# Altium PCB PCB Other.PcbDoc
Units mm, origin at the board's own origin, x right, y up, seen from the top; angles counter-clockwise.
Board outline 66.85 x 61.88 mm, 2 copper layers (Top Layer, Bottom Layer); 14 components, 8 nets, 43 pads, 4 vias.
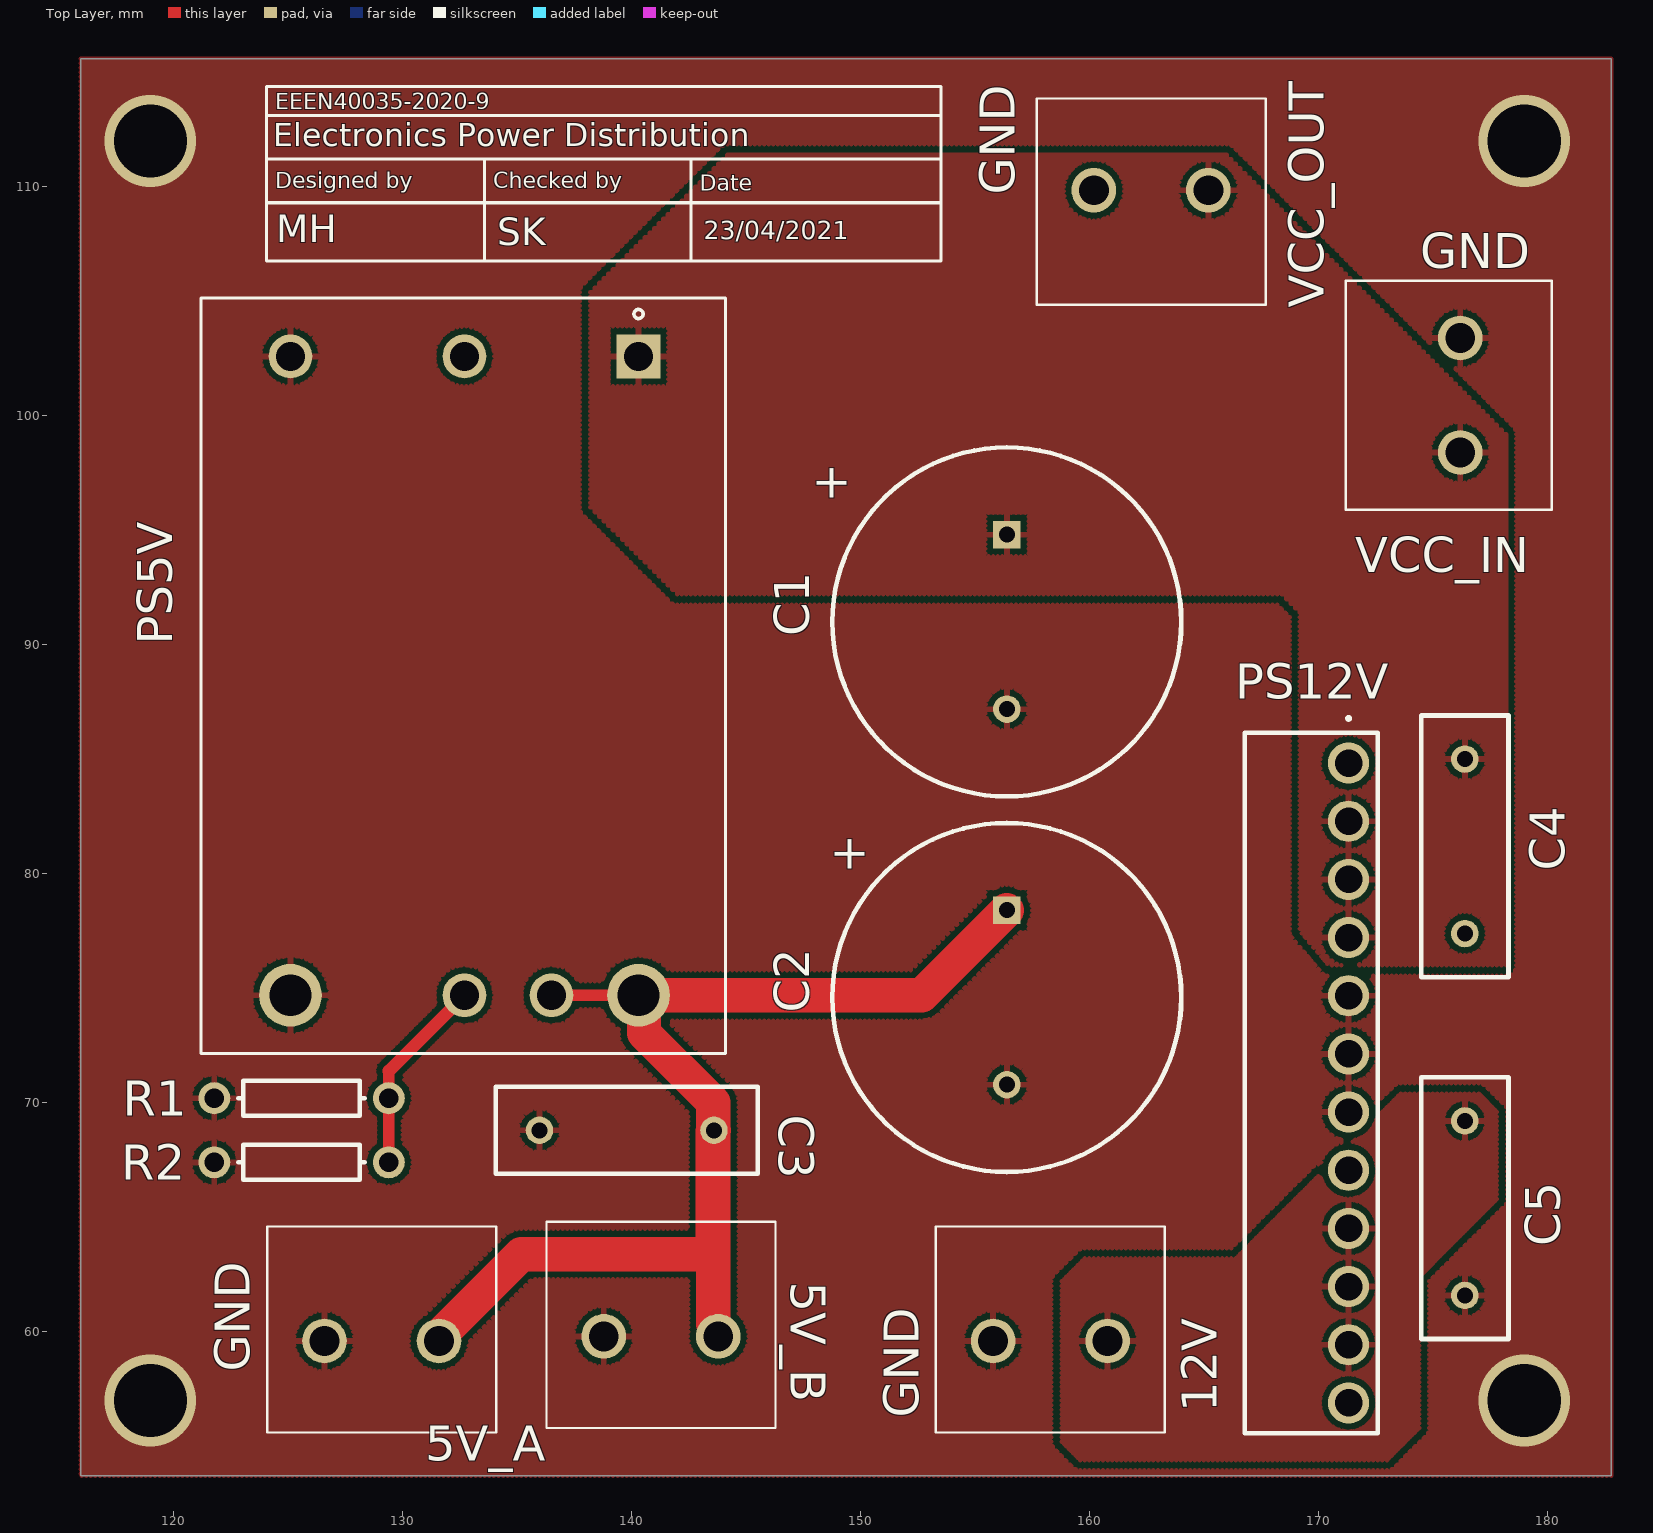
[diagram p0: Top Layer view]
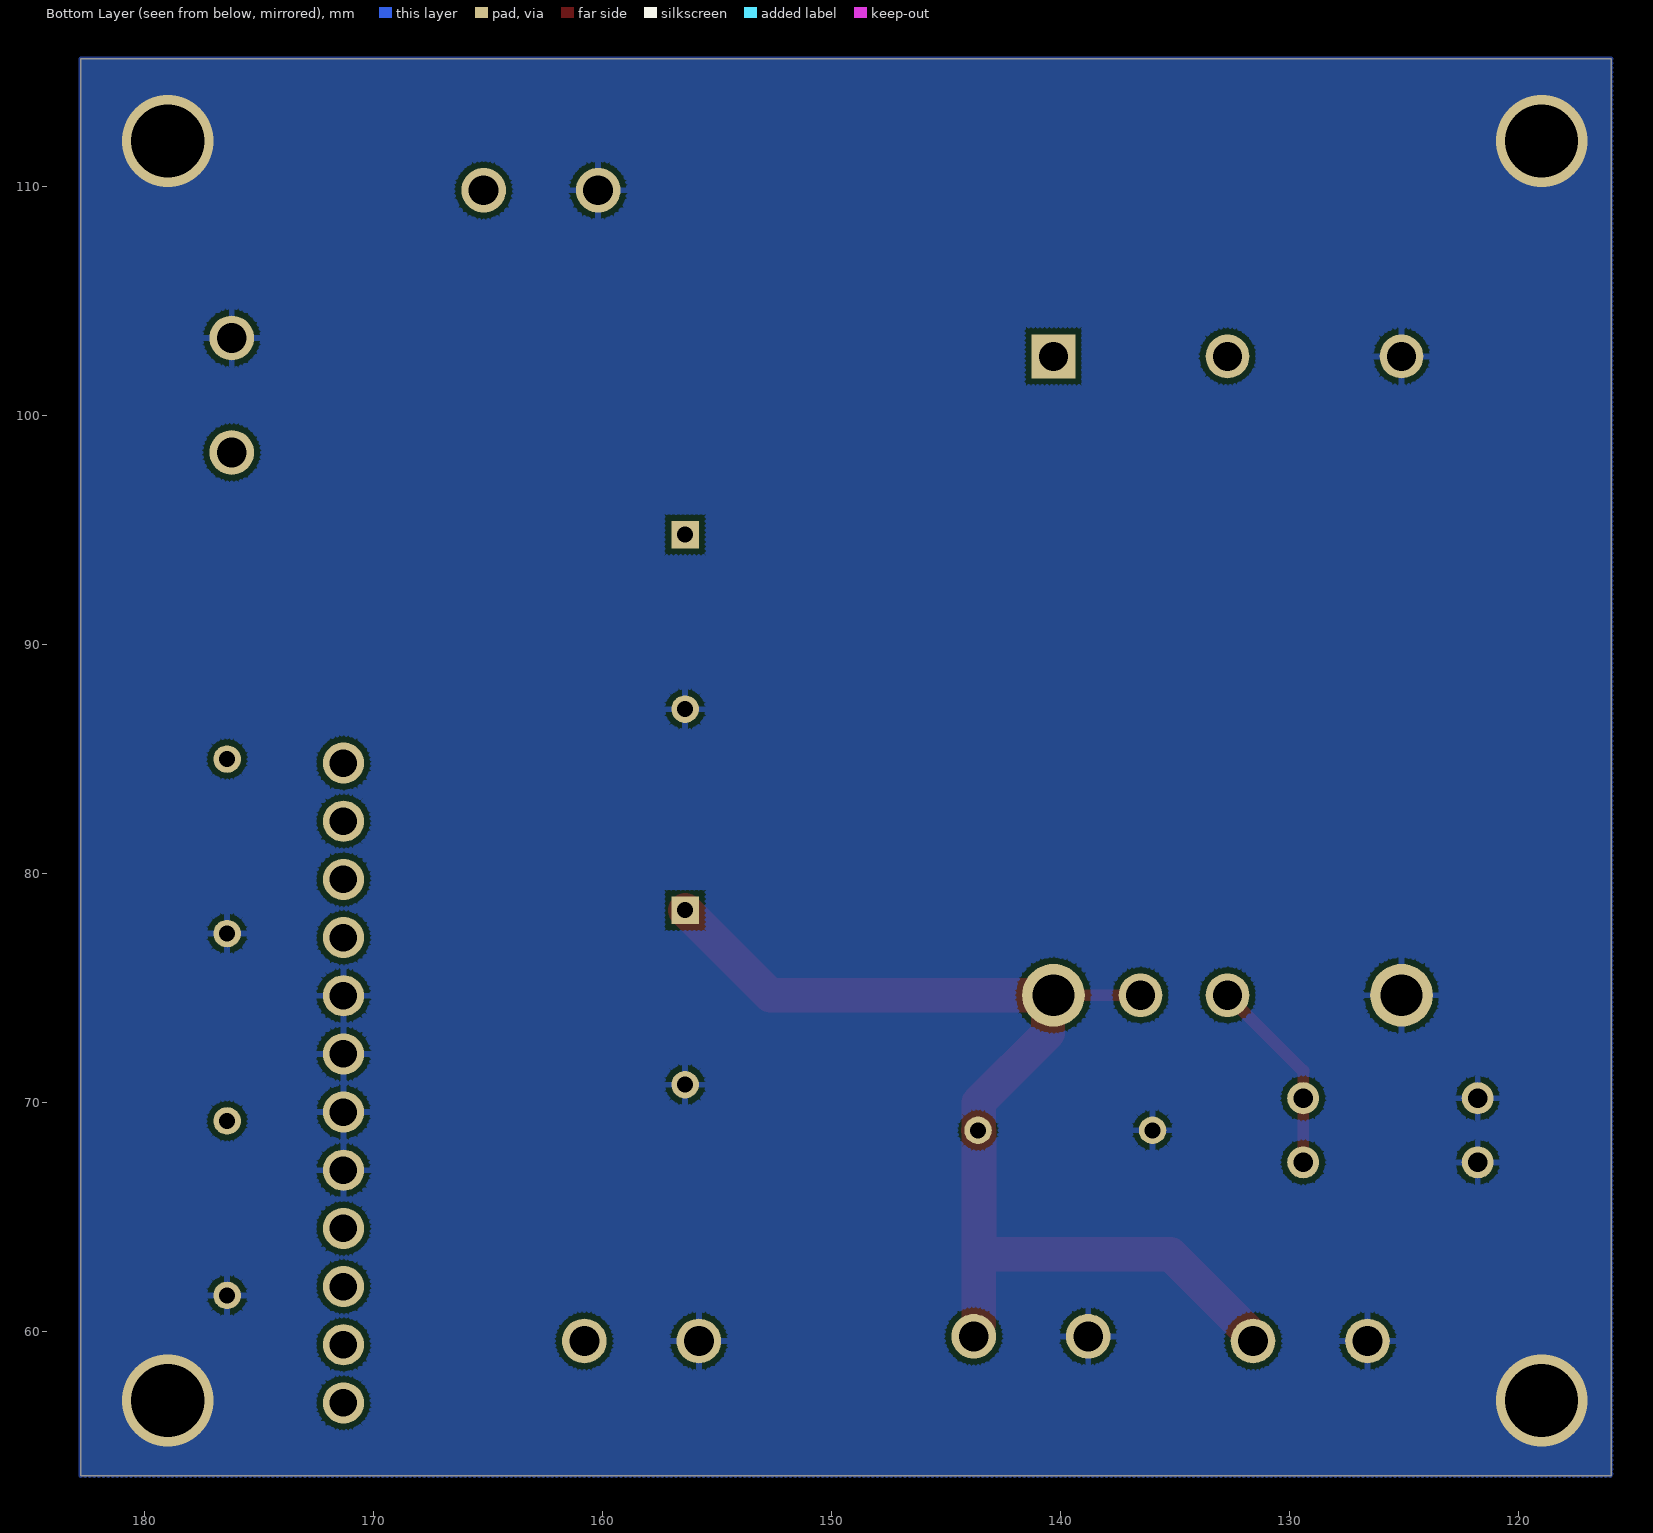
[diagram p1: Bottom Layer view, seen from below]
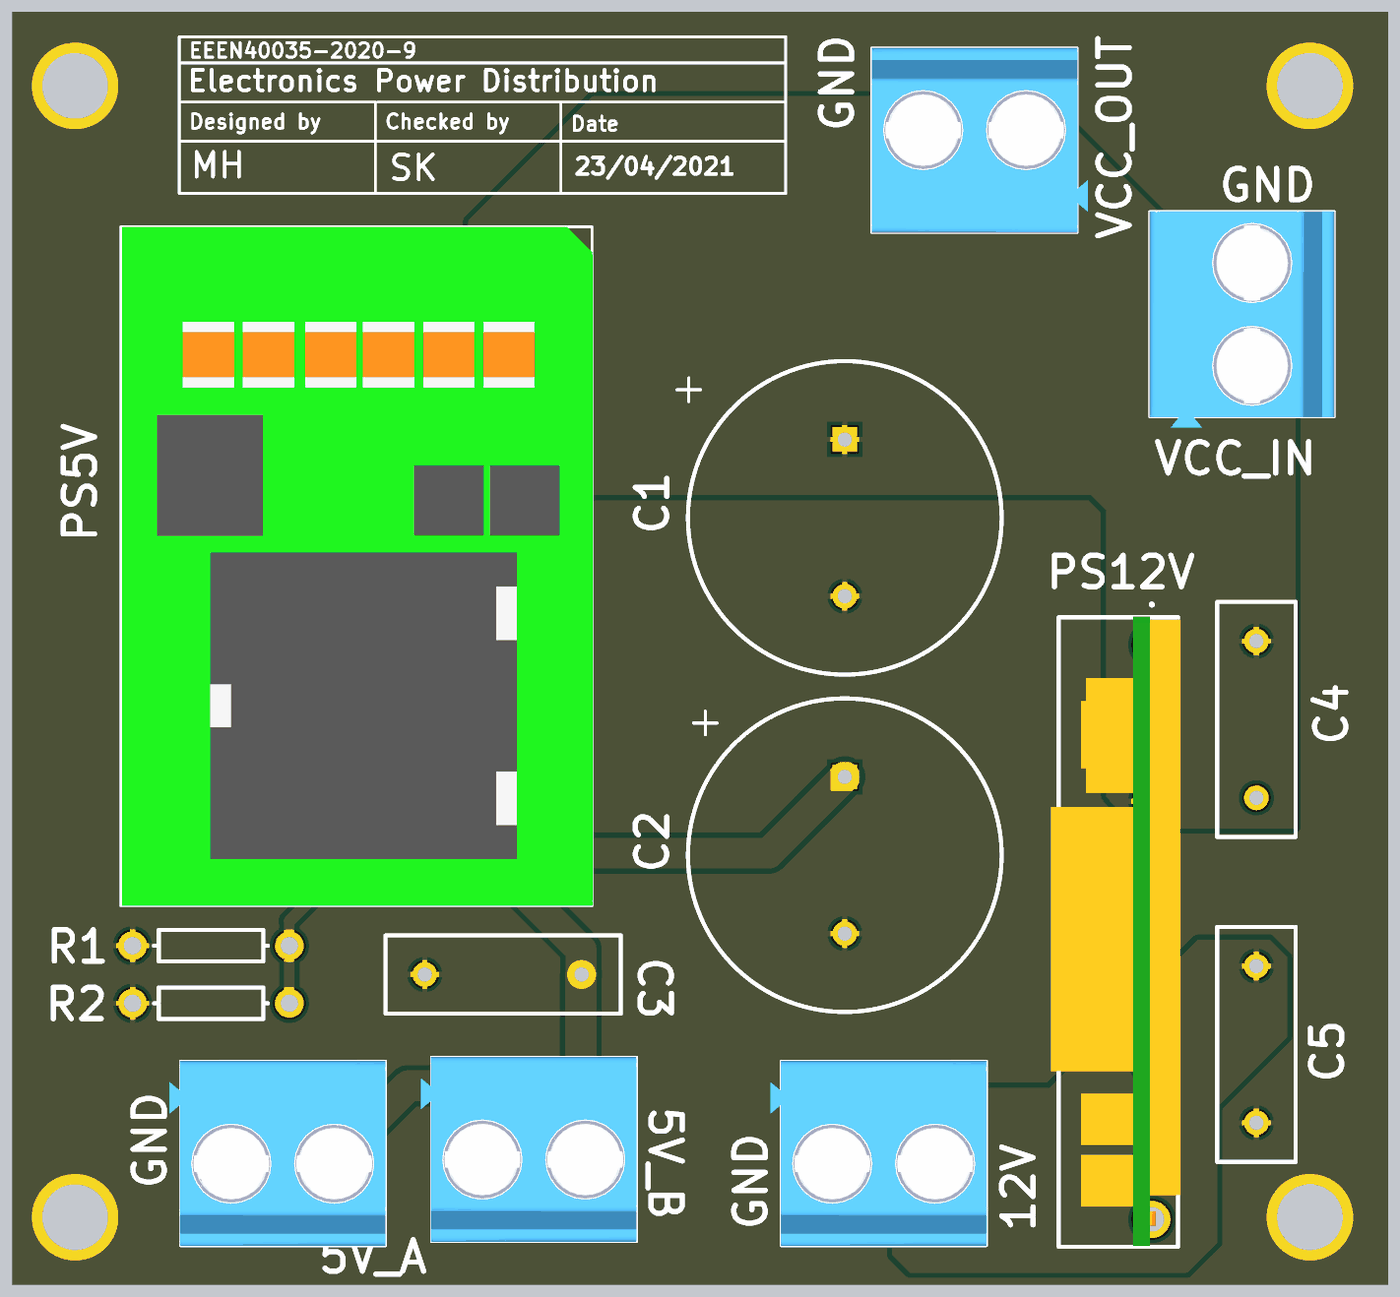
[diagram p2: 3D render of the assembled board from above, using the file's embedded part models]

## Layer stack, top to bottom
Top Solder: solder mask 0.0102, Solder Resist, Dk 3.5
Top Layer: signal copper 0.0356
Dielectric 1: dielectric 0.32, FR-4, Dk 4.8
Bottom Layer: signal copper 0.0356
Bottom Solder: solder mask 0.0102, Solder Resist, Dk 3.5

## Board outline
115.951,53.721 182.8,53.721 182.8,115.6 115.951,115.6

## Design rules (kind name [scope] priority, off if disabled: settings)
Clearance [All] p1: gap=0.254 ignorepadtopadclearanceinfootprint=FALSE except(0: Arc-Hole Track-Hole SMDPad-Hole THPad-Hole Via-Hole Fill-Hole Poly-Hole Region-Hole Text-Hole)
PolygonConnect [All] p1: connectstyle=Relief reliefconductorwidth=0.254 reliefentries=4 polygonreliefangle="90 Angle" airgapwidth=0.254
RoutingVias [All] p1: holewidth=0.711 width=1.27 viastyle="Through Hole" minholewidth=0.711 minwidth=1.27 maxholewidth=0.711 maxwidth=1.27
SolderMaskExpansion [All] p1: expansion=0.102 istentingtop=FALSE
Width [All] p1: maxlimit=4 minlimit=0.2 preferedwidth=0.3
30 further rules are at their usual default settings.

## Components (designator, comment, footprint, x,y, rotation, side; value= is the part's Value field where it differs from the comment)
5V_A "TB001-500-02BE" TB00150002BE 126.6,59.6 r0 top
5V_B "TB001-500-02BE" TB00150002BE 138.8,59.8 r0 top
12V "TB001-500-02BE" TB00150002BE 155.8,59.6 r0 top
C1 "Cap Pol1" RB7.6-15 156.4,91 r90 top value=100uF
C2 "Cap Pol1" RB7.6-15 156.4,74.6 r90 top value=22uF
C3 "Cap" RAD-0.3 139.8,68.8 r0 top value=100pF
C4 "Cap" RAD-0.3 176.4,81.2 r90 top value=100uF
C5 "Cap" RAD-0.3 176.4,65.4 r90 top value=22uF
PS5V "I6A4W020A033V-001-R" TDK-LAMBDA_I6A4W020A033V-001-R 132.715,88.646 r270 top
PS12V "P783F-Q24-S12-S" P783FQ24S12S 171.323,84.836 r270 top
R1 "Rup" AXIAL-0.3 125.6,70.2 r180 top value=18k
R2 "Rup" AXIAL-0.3 125.6,67.4 r180 top value=16k
VCC_IN "TB001-500-02BE" TB00150002BE 176.2,98.4 r90 top
VCC_OUT "TB001-500-02BE" TB00150002BE 165.2,109.854 r180 top

## Footprints (in the part's own frame and the unit in brackets; to place one, negate y for a bottom-side part, rotate by r counter-clockwise, add the part's x,y. Pads: shape width x height; smd on the part's side, far side on the other; paste and mask are expansions set on the pad)
AXIAL-0.3 [mm] "Axial Device, Thru-Hole; 2 Leads; 0.3 in Pin Spacing"
  round 1.4 hole 0.85: 1(-3.81,0) 2(3.81,0)
  silkscreen extent -2.77,-0.76 2.77,0.76
P783FQ24S12S [mm]
  round 1.8 hole 1.2: 1(0,0) 2(2.54,0) 3(5.08,0) 4(7.62,0) 5(10.16,0) 6(12.7,0) 7(15.24,0) 8(17.78,0) 9(20.32,0) 10(22.86,0) 11(25.4,0) 12(27.94,0)
  silkscreen extent -2,-4.53 29.27,1.27, body extent -1.37,-4.91 29.23,1.4, height 13.6
RAD-0.3 [mm] "Radial Cap, Thru-Hole; 2 Leads; 0.3 in Pin Spacing"
  round 1.2 hole 0.7: 1(-3.81,0) 2(3.81,0)
  silkscreen extent -5.71,-1.91 5.71,1.91
RB7.6-15 [mm] "Polarized Capacitor (Radial); 2 Leads"
  rect 1.2x1.2 hole 0.7: 1(3.81,0)
  round 1.2 hole 0.7: 2(-3.81,0)
  silkscreen extent -7.62,-7.62 7.62,7.62
TB00150002BE [mm]
  round 1.95 hole 1.3: 1(0,0) 2(5,0)
  silkscreen extent -2.5,-4 7.5,5, body extent -3.01,-4 7.49,5, height 13.01
TDK-LAMBDA_I6A4W020A033V-001-R [mm]
  rect 1.911x1.911 hole 1.274: 1(-13.95,7.6)
  round 1.911 hole 1.274: 2(-13.95,0) 3(-13.95,-7.6) 6(13.95,0) 7(13.95,3.8)
  round 2.736 hole 1.824: 4(13.95,-7.6) 8(13.95,7.6)
  silkscreen extent -16.5,-11.5 16.5,11.4, body extent -16.51,-11.43 16.51,11.43, height 12.17

## Part data
5V_A 5V_B 12V VCC_IN VCC_OUT: "Integrated Circuit", Manufacturer_Name="CUI Inc.", Mouser2 Part Number=490-TB001-500-02BE, Datasheet Link=https://componentsearchengine.com//TB001-500-02BE.pdf, Height=12.9mm, Manufacturer_Part_Number=TB001-500-02BE, Mouser2 Price/Stock=https://www.mouser.com/Search/Refine.aspx?Keyword=490-TB001-500-02BE
C1 C2: "Polarized Capacitor (Radial)", LatestRevisionDate=17-Jul-2002, LatestRevisionNote="Re-released for DXP Platform.", PackageDescription="Polarized Capacitor (Radial); 2 Leads", PackageReference=RB7.6-15, Published=8-Jun-2000, Publisher="Altium Limited"
C3 C4 C5: "Capacitor", LatestRevisionDate=17-Jul-2002, LatestRevisionNote="Re-released for DXP Platform.", PackageDescription="Radial Cap, Thru-Hole; 2 Leads; 0.3 in Pin Spacing", PackageReference=RAD-0.3, Published=8-Jun-2000, Publisher="Altium Limited"
PS5V: "Non-Isolated PoL Module DC DC Converter 1 Output 3.3 ~ 15V 20A 9V - 53V Input", Package="DIP-7 TDK-Lambda", Digi-Key_Part_Number=285-2503-ND, Digi-Key_Purchase_URL=https://www.digikey.com/product-detail/en/tdk-lambda-americas-inc/I6A4W020A033V-001-R/285-2503-ND/5878834?utm_source=snapeda&utm_medium=aggregator&utm_campaign=symbol, MF="TDK-Lambda Americas", MP=I6A4W020A033V-001-R, SnapEDA_Link=https://www.snapeda.com/parts/I6A4W020A033V-001-R/TDK-Lambda%20Americas%20Inc./view-part/1737324/?ref=snap
PS12V: "Power Supply", Manufacturer_Name="CUI Inc.", Datasheet Link=https://www.cui.com/product/resource/p783f-s.pdf, Height=13mm, Manufacturer_Part_Number=P783F-Q24-S12-S
R1 R2: library part Res1, "Resistor", LatestRevisionDate=17-Jul-2002, LatestRevisionNote="Re-released for DXP Platform.", PackageDescription="Axial Device, Thru-Hole; 2 Leads; 0.3 in Pin Spacing", PackageReference=AXIAL-0.3, Published=8-Jun-2000, Publisher="Altium Limited"

## Via types
v1: diameter 4, hole 3.2, Top Layer to Bottom Layer, 4 vias

## Nets (pads, with @x,y where several pads share a name; then routed paths per layer and width w, separated by ;. In a path a pad name is that pad's centre, name@x,y a point inside that pad or via, vN(x,y) a via of type N, cw(c..) or ccw(c..) an arc to the next point about the centre after c; other vN are vias at no path point)
GND: 5V_A.1 5V_B.1 12V.1 C1.2 C2.2 C3.1 C4.1 C5.1 PS5V.3 PS5V.4 PS12V.5 PS12V.6 PS12V.7 PS12V.8 R1.2 R2.2 VCC_IN.2 VCC_OUT.2
  other v1: 119,57 179,57 119,112 179,112
NetC6_1: 
NetPS5V_6: PS5V.6 R1.1 R2.1 | length 8.7
  Top Layer w0.5: R2.1 R1.1 129.41,71.391
  Top Layer w0.55: 129.41,71.391 PS5V.6
NetPS24V_6: 
VCC: C1.1 C4.2 PS5V.1 PS12V.2 PS12V.3 PS12V.4 VCC_IN.1 VCC_OUT.1
VCC_5V: 5V_A.2 5V_B.2 C2.1 C3.2 PS5V.7 PS5V.8 | length 56.8
  Top Layer w0.5: PS5V.7 PS5V.8
  Top Layer w1.5: 5V_A.2 131.6,59.722 131.825,59.947 131.825,60.025 135.193,63.393 143.557,63.393 143.557,68.747 C3.2@143.584,68.774 ; C3.2 C3.2@143.584,68.774 ; 5V_B.2 143.714,59.886 143.714,60.204 143.584,60.335 143.584,63.393 C3.2@143.584,68.774 ; C2.1 152.686,74.696 PS5V.8 140.551,74.46 140.551,73.049 143.584,70.016 C3.2@143.584,68.774
VCC_12V: 12V.2 C5.2 PS12V.9 PS12V.10 PS12V.11 | length 0.1
  Top Layer w0.3: C5.2 C5.2@176.474,69.284
  Top Layer w0.762: PS12V.9@171.301,64.494 PS12V.9
VCC_24V: 
pads on no net: PS5V.2 PS12V.1 PS12V.12

## Polygon pours and split planes (outlines as drawn)
GND on Top Layer "GND_L01_P000" (hatched 90Degree grid 0 track 0.2, pour order 4): 115.951,53.721 182.8,53.721 182.8,115.6 115.951,115.6
VCC_12V on Top Layer "VCC_12V_L01_P002" (hatched 45Degree grid 0 track 0.2, pour order 2): 158.8,55.2 159.6,54.4 173,54.4 174.4,55.8 174.4,62.4 177.8,65.8 177.8,69.6 177,70.4 173.6,70.4 166.4,63.2 159.8,63.2 158.8,62.2
VCC on Top Layer "VCC_L01_P000" (hatched 90Degree grid 0 track 0.2, pour order 0): 169.2,77.491 170.461,76 178.2,76 178.2,99.2 166,111.4 144.2,111.4 138.2,105.4 138.2,96 142,92.2 168.4,92.2 169.2,91.4
GND on Bottom Layer "GND_L02_P001" (hatched 90Degree grid 0 track 0.2, pour order 1): 115.951,115.6 115.951,53.721 182.8,53.721 182.8,115.6

## Silkscreen, mask and mechanical layers (free items; w line width, h text height)
Top Overlay:
  lines w0.14: 124.063,109.307 153.527,109.307 ; 124.063,113.117 153.527,113.117 ; 133.588,106.767 133.588,111.212 ; 142.605,106.767 142.605,111.212 ; 153.527,111.212 124.063,111.212 ; 124.063,111.212 124.063,114.387 153.527,114.387 153.527,111.085 153.527,106.767 124.063,106.767 124.063,111.212
  text "EEEN40035-2020-9" at 124.457,113.384 h0.7
  text "Electronics Power Distribution" at 124.37,111.773 h1
  text "Designed by" at 124.457,109.934 h0.7
  text "Checked by" at 133.982,109.934 h0.7
  text "Date" at 142.999,109.828 h0.7
  text "GND" at 156.746,109.654 h1.52 r90
  text "23/04/2021" at 143.166,107.709 h0.8
  text "MH" at 124.497,107.582 h1.2
  text "SK" at 134.149,107.455 h1.2
  text "GND" at 174.454,106.454 h1.52
  text "GND" at 123.346,58.254 h1.52 r90
  text "GND" at 152.546,56.254 h1.52 r90

## Text inside footprints (layer, text, board x,y; h text height)
C1: Top Overlay "+" at 149.4,96.2 h1.5 r90
C2: Top Overlay "+" at 150.2,80 h1.5 r90